# Altium PCB SIRA.PcbDoc
Units mil, origin at the board's own origin, x right, y up, seen from the top; angles counter-clockwise.
Board outline 5655.03 x 5610.03 mil, 2 copper layers (Top Layer, Bottom Layer); 41 components, 97 nets, 206 pads, 0 vias.
Unrouted connection lines stored in the file: 12.
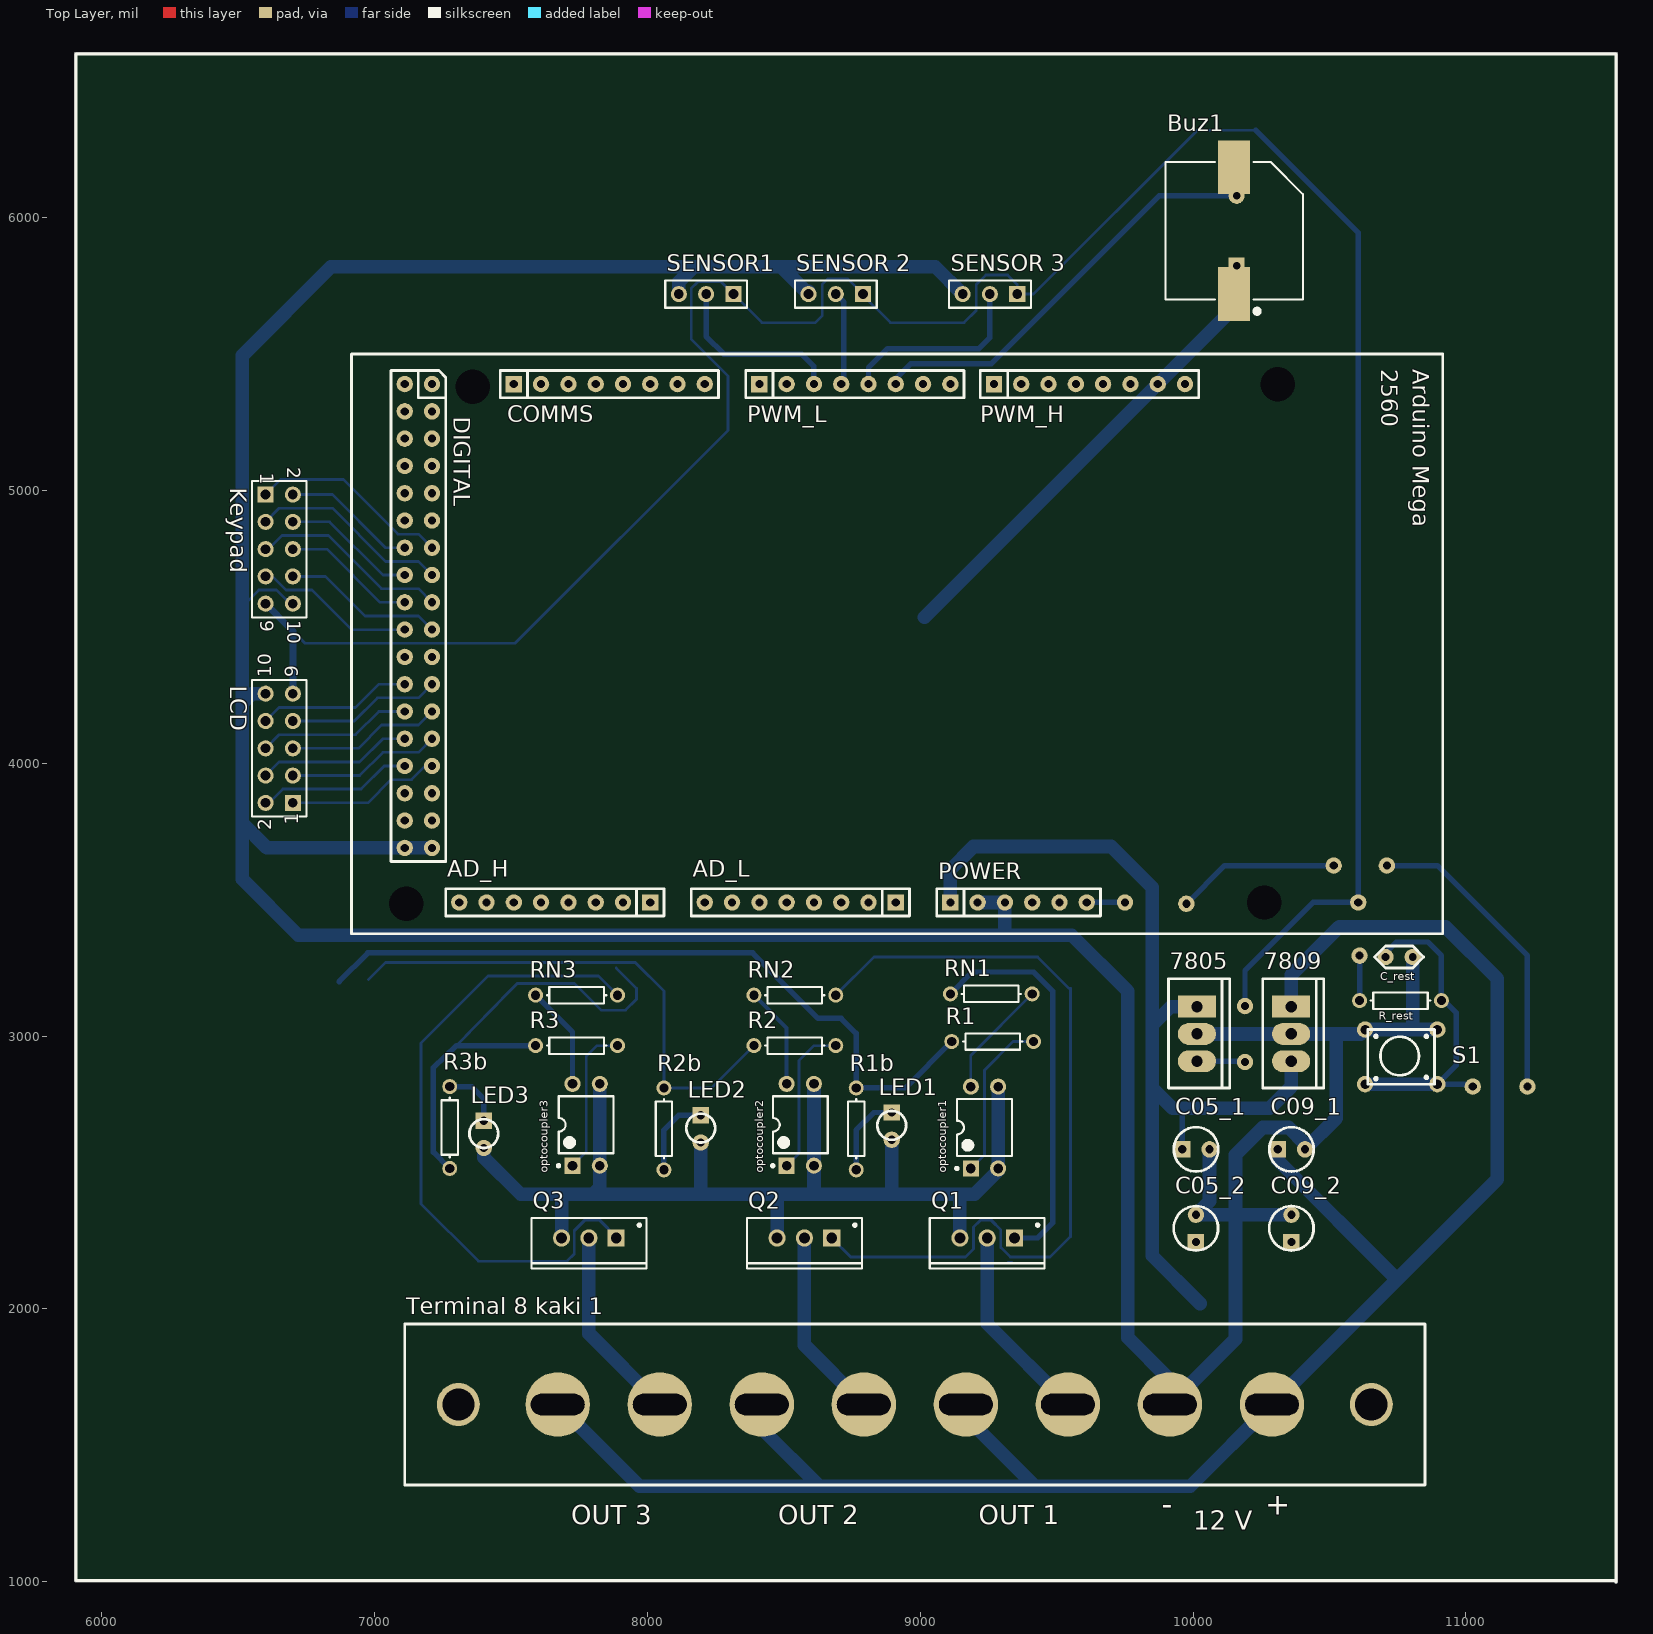
[diagram p0: Top Layer view]
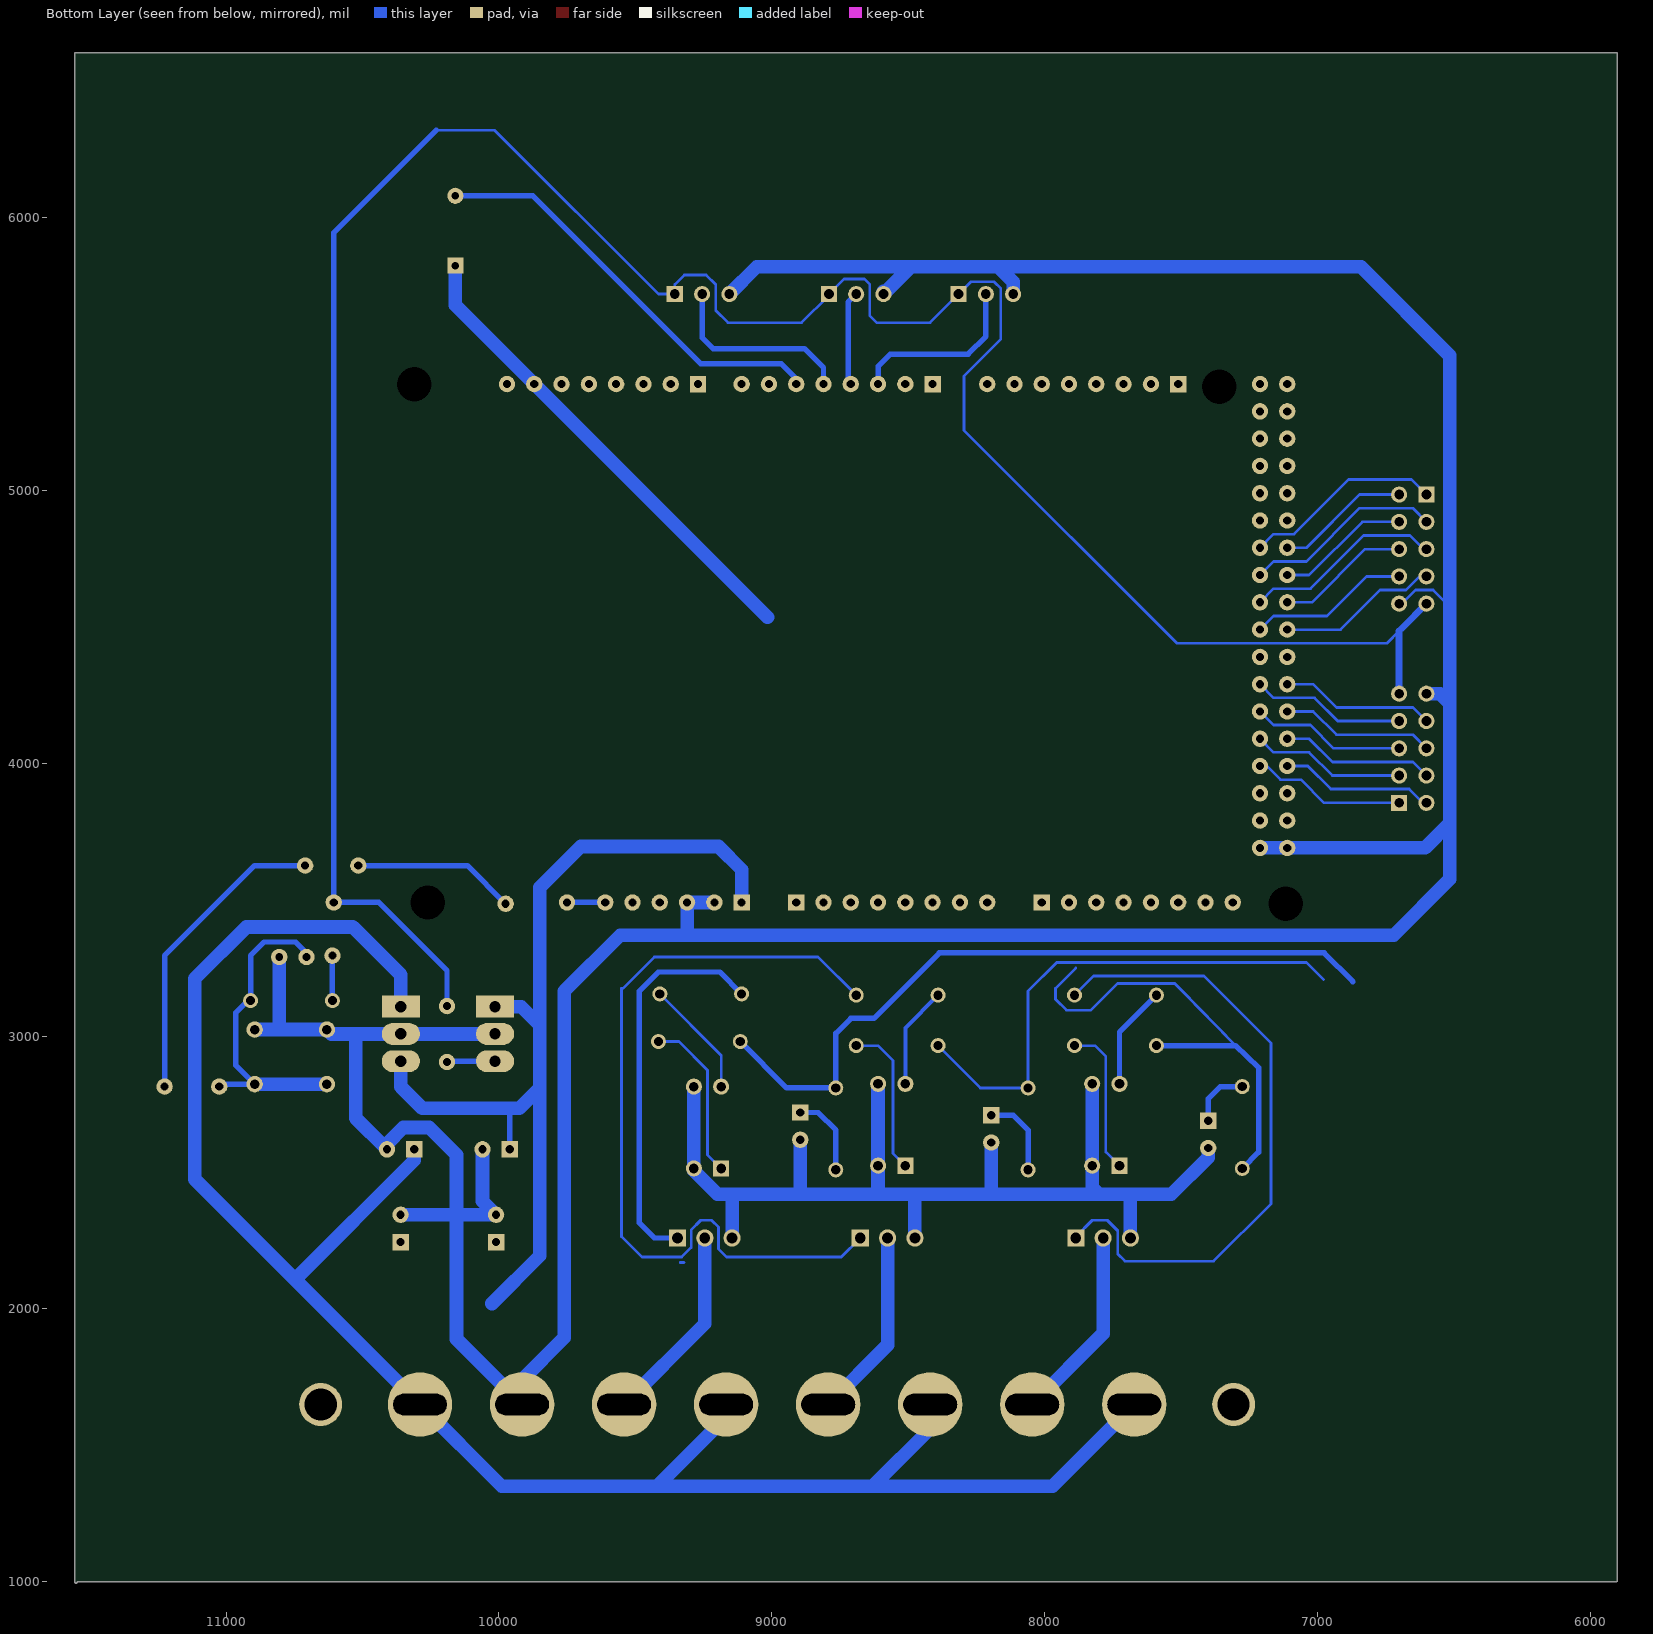
[diagram p1: Bottom Layer view, seen from below]

## Layer stack, top to bottom
Top Solder: solder mask 0.4, Solder Resist, Dk 3.5
Top Layer: signal copper 1.4
Dielectric 1: dielectric 12.6, FR-4, Dk 4.8
Bottom Layer: signal copper 1.4
Bottom Solder: solder mask 0.4, Solder Resist, Dk 3.5

## Board outline
5899.98,1005 ccw(c5905,1005) 5905,999.99 11544.99,999.99 ccw(c11550,1000) 11555.01,1000 11555.01,6600 ccw(c11550,6600) 11550,6605.02 5905,6605.02 ccw(c5905,6600) 5899.98,6600

## Design rules (kind name [scope] priority, off if disabled: settings)
Clearance [All] p1: gap=10
PolygonConnect [All] p1: connectstyle=Relief reliefconductorwidth=10 reliefentries=4 polygonreliefangle="90 Angle" airgapwidth=10
RoomDefinition SIRA [InComponentClass('SIRA')] p1: confinementstyle=ConfineIn formatcopy=TRUE lockcomponents=FALSE outline 5905,1000 11555,1000 11555,6600 5905,6600
RoutingVias [All] p1: holewidth=28 width=50 viastyle="Through Hole" minholewidth=28 minwidth=50 maxholewidth=28 maxwidth=50
SolderMaskExpansion [All] p1: expansion=4
Width [All] p1: maxlimit=50 minlimit=10 preferedwidth=15
30 further rules are at their usual default settings.

## Components (designator, comment, footprint, x,y, rotation, side; value= is the part's Value field where it differs from the comment)
7805 "78XX/79XX" "78XX/79XX diri" 10310,3410 r0 top
7809 "78XX/79XX" "78XX/79XX diri" 10655,3410 r0 top
AD_H "AD_H" "Header 8x1 8.5mm" 8010,3490 r180 top
AD_L "AD_L" "Header 8x1 8.5mm" 8910,3490 r180 top
Buz1 "Buzzer" ABSM-1574 10150,5720 r90 top
C05_1 "cap 1uF/50V" "cap 1uF/50V" 9660,2585 r0 top
C05_2 "cap 1uF/50V" "cap 1uF/50V" 10010,1945 r90 top
C09_1 "cap 1uF/50V" "cap 1uF/50V" 10010,2585 r0 top
C09_2 "cap 1uF/50V" "cap 1uF/50V" 10360,1945 r90 top
C_rest "cap 22/33uF" "cap 22/33uF" 11105,3290 r180 top
COMMS "Communication" "Header 8x1 8.5mm" 7510,5390 r0 top
DIGITAL "IO_36" "HEADER 36X 8MM" 7210,5390 r270 top
Keypad "Header 5X2" HDR2X5 6600,4985 r270 top
LCD "Header 5X2" HDR2X5 6700,3855 r90 top
LED1 "LED kecil" "LED kecil" 8995,2620 r270 top
LED2 "LED kecil" "LED kecil" 8295,2610 r270 top
LED3 "LED kecil" "LED kecil" 7500,2590 r270 top
optocoupler1 "Optoisolator1" DIP-4 9235,2665 r90 top
optocoupler2 "Optoisolator1" DIP-4 8560,2675 r90 top
optocoupler3 "Optoisolator1" DIP-4 7775,2675 r90 top
POWER "POWER" "Header 6x1 8.5mm" 9110,3490 r0 top
PWM_H "PWM_H" "Header 8x1 8.5mm" 9270,5390 r0 top
PWM_L "PWM_L" "Header 8x1 8.5mm" 8410,5390 r0 top
Q1 "IRF540N" TO-220AB 9245,2260 r180 top
Q2 "IRF540N" TO-220AB 8575,2260 r180 top
Q3 "IRF540N" TO-220AB 7785,2260 r180 top
R1 "Res1" AXIAL-0.3 9265,2980 r0 top
R1b "Res1" AXIAL-0.3 8765,2660 r90 top
R2 "Res1" AXIAL-0.3 8540,2965 r0 top
R2b "Res1" AXIAL-0.3 8060,2660 r90 top
R3 "Res1" AXIAL-0.3 7740,2965 r0 top
R3b "Res1" AXIAL-0.3 7275,2665 r270 top
R_rest "Comment" AXIAL-0.3 10760,3130 r0 top
RN1 "Res1" AXIAL-0.3 9260,3155 r180 top
RN2 "Res1" AXIAL-0.3 8540,3150 r0 top
RN3 "Res1" AXIAL-0.3 7740,3150 r0 top
S1 "pushbutton" pushbutton 11195,2925 r0 top
SENSOR1 "Header 3" HDR1X3 8315,5720 r180 top
"SENSOR 2" "Header 3" HDR1X3 8790,5720 r180 top
"SENSOR 3" "Header 3" HDR1X3 9355,5720 r180 top
"Terminal 8 kaki 1" "Terminal Blok 8 Kaki Besar" "TERMINAL 8 KAKI" 10850,1945 r180 top

## Footprints (in the part's own frame and the unit in brackets; to place one, negate y for a bottom-side part, rotate by r counter-clockwise, add the part's x,y. Pads: shape width x height; smd on the part's side, far side on the other; paste and mask are expansions set on the pad)
"78XX/79XX diri" [mil]
  rect 140x80 hole 42: 1(-296,-302)
  oval 140x80 hole 42: 2(-296,-402) 3(-296,-502)
  silkscreen extent -400,-600 -176,-200
ABSM-1574 [mm] "Magnetic Transducer Buzzer"
  rect 5x3 smd: 1(0,0) 2(11.8,0)
  rect 1.5x1.5 hole 0.7: 1A(2.65,-0.24)
  round 1.5 hole 0.7: 2A(9.15,-0.24)
  silkscreen extent -1.83,-6.4 12.3,6.4
AXIAL-0.3 [mm] "Axial Device, Thru-Hole; 2 Leads; 0.3 in Pin Spacing"
  round 1.4 hole 0.85: 1(-3.81,0) 2(3.81,0)
  silkscreen extent -2.77,-0.76 2.77,0.76
"cap 1uF/50V" [mil]
  rect 60x60 hole 30: 1(300,0)
  round 60 hole 30: 2(400,0)
  silkscreen extent 269,-81 432,81
"cap 22/33uF" [mil]
  round 60 hole 28: 1(300,0) 2(400,0)
  silkscreen extent 260,-40 440,40
DIP-4 [mm] "DIP; 4 Leads; Row Spacing 7.62 mm; Pitch 2.54 mm"
  rect 1.5x1.5 hole 0.9: 1(-3.81,1.27)
  round 1.5 hole 0.9: 2(-3.81,-1.27) 3(3.81,-1.27) 4(3.81,1.27)
  silkscreen extent -3.93,-2.55 2.65,2.69, body extent -3.15,-2.5 3.15,2.5, height 5.6
HDR1X3 [mm] "Connector; Header; 3 Position"
  rect 1.5x1.5 hole 0.9: 1(0,0)
  round 1.5 hole 0.9: 2(2.54,0) 3(5.08,0)
  silkscreen extent -1.27,-1.27 6.35,1.27
HDR2X5 [mm] "Connector; Header; 5x2 Position"
  rect 1.5x1.5 hole 0.9: 1(0,0)
  round 1.5 hole 0.9: 2(0,2.54) 3(2.54,0) 4(2.54,2.54) 5(5.08,0) 6(5.08,2.54) 7(7.62,0) 8(7.62,2.54) 9(10.16,0) 10(10.16,2.54)
  silkscreen extent -1.27,-1.27 11.43,3.81
"Header 6x1 8.5mm" [mil] "Stackable 6 pin header"
  rect 60x60 hole 30: 1(0,0)
  round 60 hole 30: 2(100,0) 3(200,0) 4(300,0) 5(400,0) 6(500,0)
  silkscreen extent -50,-50 550,50, body extent -50,-50 550,50, height 335
"Header 8x1 8.5mm" [mil] "Stackable 8 pin header"
  rect 60x60 hole 30: 1(0,0)
  round 60 hole 30: 2(100,0) 3(200,0) 4(300,0) 5(400,0) 6(500,0) 7(600,0) 8(700,0)
  silkscreen extent -50,-50 750,50, body extent -50,-50 750,50, height 335
"HEADER 36X 8MM" [mil] "Stackable 10 pin header"
  round 60 hole 30: 1(0,0) 2(0,-100) 3(100,0) 4(100,-100) 5(200,0) 6(200,-100) 7(300,0) 8(300,-100) 9(400,0) 10(400,-100) 11(500,0) 12(500,-100) 13(600,0) 14(600,-100) 15(700,0) 16(700,-100) 17(800,0) 18(800,-100) 19(900,-100) 20(900,0) 21(1000,0) 22(1000,-100) 23(1100,0) 24(1100,-100) 25(1200,0) 26(1200,-100) 27(1300,0) 28(1300,-100) 29(1400,0) 30(1400,-100) 31(1500,0) 32(1500,-100) 33(1600,0) 34(1600,-100) 35(1700,0) 36(1700,-100)
  silkscreen extent -50,-150 1750,50, body extent -50,-150 1750,50, height 335
"LED kecil" [mil]
  rect 60x60 hole 30: 1(-100,-100)
  round 60 hole 30: 2(0,-100)
  silkscreen extent -106,-153 0,-47
pushbutton [mil]
  round 60 hole 35: 1(-565,-101) 1(-300,-101) 2(-565,99) 2(-300,99)
  silkscreen extent -555,-101 -310,99
"TERMINAL 8 KAKI" [mm] "Terminal Blok Hitam 8 Kaki"
  round 6 hole 2 slot 5 at 0 deg: 1(14.25,7.5) 2(23.75,7.5) 3(33.25,7.5) 4(42.75,7.5) 5(52.25,7.5) 6(61.75,7.5) 7(71.25,7.5) 8(80.75,7.5)
  round 4 hole 3: " "(5,7.5) " "(90,7.5)
  silkscreen extent 0,0 95,15
TO-220AB [mm] "TO, Thru-Hole, Vertical, Heatsink Mounted; 3 In-Line Leads; Pitch 2.54 mm"
  rect 1.6x1.6 hole 1: 1(-2.54,0)
  round 1.6 hole 1: 2(0,0) 3(2.54,0)
  silkscreen extent -5.35,-1.85 5.35,2.85, body extent -5.4,-1.9 5.4,2.9, height 19.3

## Part data
7805 7809: library part 7805/7809/7812/7905/7909/7912
Buz1: "Magnetic Transducer Buzzer"
Keypad LCD: "Header, 5-Pin, Dual row"
optocoupler1 optocoupler2 optocoupler3: "4-Pin Phototransistor Optocoupler"
Q1 Q2 Q3: "HEXFET Power MOSFET"
R1 R1b R2 R2b R3 R3b RN1 RN2 RN3: "Resistor"
SENSOR1 "SENSOR 2" "SENSOR 3": "Header, 3-Pin"
"Terminal 8 kaki 1": library part "Terminal Block 8 kaki"

## Free pads (board coordinates)
  round 62.99 hole 125.98: 0(7115,3485) 0(7360,5380) 0(10260,3490) 0(10310,5390)
  round 60 hole 30: 2(10605,3490) 3(10610,3295) 4(10190,2905) 5(10190,3110) 6(9750,3490) 7(9975,3485) 8(11025,2815) 9(11225,2815) 10(10710,3625) 11(10515,3625)

## Nets (pads, with @x,y where several pads share a name; then routed paths per layer and width w, separated by ;. In a path a pad name is that pad's centre, name@x,y a point inside that pad or via, vN(x,y) a via of type N, cw(c..) or ccw(c..) an arc to the next point about the centre after c; other vN are vias at no path point)
3V3: POWER.5
5V: POWER.4
AD0: AD_L.1
AD1: AD_L.2
AD2: AD_L.3
AD3: AD_L.4
AD4: AD_L.5
AD5: AD_L.6
AD6: AD_L.7
AD7: AD_L.8
AD8: AD_H.1
AD9: AD_H.2
AD10: AD_H.3
AD11: AD_H.4
AD12: AD_H.5
AD13: AD_H.6
AD14: AD_H.7
AD15: AD_H.8
AREF: PWM_H.8
GND: 7805.2 7809.2 "SENSOR 2.3" "SENSOR 3.3" "Terminal 8 kaki 1.2" Buz1.1 Buz1.1A C05_1.2 C05_2.2 C09_1.2 C09_2.2 C_rest.1 DIGITAL.35 DIGITAL.36 Keypad.10 LCD.10 LED1.2 LED2.2 LED3.2 optocoupler1.2 optocoupler1.3 optocoupler2.2 optocoupler2.3 optocoupler3.2 optocoupler3.3 POWER.2 POWER.3 PWM_H.7 Q1.3 Q2.3 Q3.3 S1.2 SENSOR1.3 | length 20642.4
  Bottom Layer w10: 6515,4574.53 6575.47,4635 6639.64,4635 6689.64,4585 Keypad.10
  Bottom Layer w50: LCD.10 6550,4255 6515,4220 ; DIGITAL.35 DIGITAL.36 6605,3690 6515,3780 ; LED3.2 7400,2555 7535,2420 7695,2420 ; Q3.3 7685,2410 7695,2420 ; optocoupler3.3 optocoupler3.2 7825,2445 7800,2420 ; SENSOR1.3 8115,5765 8170,5820 ; 8195,2450 LED2.2 ; Q2.3 8475,2415 8470,2420 ; 8590,5730 8590,5720 8500,5810 8500,5820 ; optocoupler2.3 optocoupler2.2 8610,2430 8620,2420 ; LED1.2 8895,2434.28 8909.28,2420 ; 9015,4535 PWM_H.7 10159.45,5679.45 Buz1.1A ; Q1.3 9145,2415 9140,2420 ; 9155,5720 9055,5820 8500,5820 ; POWER.2 POWER.3 9310,3370 ; optocoupler1.3 optocoupler1.2 9285,2506.45 9198.55,2420 9140,2420 ; 7805.2 7809.2 10525,3008 ; C05_1.2 10060,2395 C05_2.2 10155,2345 ; C09_2.2 10155,2345 ; C_rest.1 10805,3039 10820,3024 ; S1.2@10895,3024 10820,3024 ; 6515,3780 6515,4220 ; 6515,3780 6515,3575 6720,3370 9015,3370 9310,3370 ; 6515,4220 6515,4574.53 6515,5495 6840,5820 8170,5820 ; 7695,2420 7800,2420 ; 7800,2420 8470,2420 ; 8170,5820 8500,5820 ; 8470,2420 8620,2420 ; 8620,2420 8909.28,2420 ; 8909.28,2420 9140,2420 ; 9310,3370 9555,3370 9760,3165 9760,1895 9914.96,1740.04 9914.96,1649.72 10155,1889.76 10155,2345 ; 10155,2345 10155,2565 10255,2665 10350,2665 10410,2605 C09_1.2 10525,2700 10525,3008 ; 10525,3008 10614,3008 10630,3024 10820,3024
GND2: 
IO22: DIGITAL.3
IO23: DIGITAL.4
IO24: DIGITAL.5
IO25: DIGITAL.6
IO26: DIGITAL.7
IO27: DIGITAL.8
IO28: DIGITAL.9
IO29: DIGITAL.10
IO30: DIGITAL.11
IO31: DIGITAL.12
IO32: DIGITAL.13 Keypad.1 | length 736.3
  Bottom Layer w10: Keypad.1 6655,5040 6885,5040 7085,4840 7160,4840 DIGITAL.13
IO33: DIGITAL.14 Keypad.2 | length 490.8
  Bottom Layer w10: Keypad.2 6845,4985 7040,4790 DIGITAL.14
IO34: DIGITAL.15 Keypad.3 | length 732.2
  Bottom Layer w10: Keypad.3 6650,4935 6845,4935 7040,4740 7160,4740 DIGITAL.15
IO35: DIGITAL.16 Keypad.4 | length 490.8
  Bottom Layer w10: Keypad.4 6835,4885 7030,4690 DIGITAL.16
IO36: DIGITAL.17 Keypad.5 | length 732.2
  Bottom Layer w10: Keypad.5 6610,4785 6660,4835 6830,4835 7025,4640 7160,4640 DIGITAL.17
IO37: DIGITAL.18 Keypad.6 | length 490.8
  Bottom Layer w10: Keypad.6 6825,4785 7020,4590 DIGITAL.18
IO38: DIGITAL.19 Keypad.7 | length 590.8
  Bottom Layer w10: Keypad.7 6625,4685 6675,4635 6770,4635 6915,4490 DIGITAL.19
IO39: DIGITAL.20 Keypad.8 | length 590.8
  Bottom Layer w10: Keypad.8 6820,4685 6965,4540 7160,4540 DIGITAL.20
IO40: DIGITAL.21
IO41: DIGITAL.22
IO42: DIGITAL.23 LCD.7 | length 565.9
  Bottom Layer w10: LCD.7 6925,4155 7010,4240 7160,4240 DIGITAL.23
IO43: DIGITAL.24 LCD.8 | length 565.9
  Bottom Layer w10: LCD.8 6649.53,4204.53 6929.53,4204.53 7015,4290 DIGITAL.24
IO44: DIGITAL.25 LCD.5 | length 565.9
  Bottom Layer w10: LCD.5 6940,4055 7025,4140 7160,4140 DIGITAL.25
IO45: DIGITAL.26 LCD.6 | length 565.9
  Bottom Layer w10: LCD.6 6650,4105 6930,4105 7015,4190 DIGITAL.26
IO46: DIGITAL.27 LCD.3 | length 565.9
  Bottom Layer w10: LCD.3 6945,3955 7030,4040 7160,4040 DIGITAL.27
IO47: DIGITAL.28 LCD.4 | length 565.9
  Bottom Layer w10: LCD.4 6649.53,4004.53 6944.53,4004.53 7030,4090 DIGITAL.28
IO48: DIGITAL.29 LCD.1 | length 565.9
  Bottom Layer w10: LCD.1 6975,3855 7060,3940 7135,3940 7185,3990 DIGITAL.29
IO49: DIGITAL.30 LCD.2 | length 565.9
  Bottom Layer w10: LCD.2 6612.66,3855 6663.13,3905.47 6950.47,3905.47 7035,3990 DIGITAL.30
IO50: DIGITAL.31
IO51: DIGITAL.32 R3.1 R3b.2 | length 1760.4
  Bottom Layer w10: 7300,2965 7500,3170 7522.56,3192.56 7732.44,3192.56 7830,3095 7920,3095 7960,3135 7960,3175 7885,3250
  Bottom Layer w20: R3b.2 7215,2575 7215,2885 7300,2965 R3.1
IO52: DIGITAL.33 R1.1 R1b.2 | length 2681.1
  Bottom Layer w20: 6870,3200 6975,3305 8385,3305 8625,3065 8710,3065 8765,3010 R1b.2 8945,2810 R1.1
IO53: DIGITAL.34 R2.1 R2b.2 | length 1901.1
  Bottom Layer w10: 6977.5,3207.5 7040,3270 7955,3270 8060,3165 R2b.2 8235,2810 R2.1
MISO: 
MOSI: 
NetLED1_1: LED1.1 R1b.1 | length 301.9
  Bottom Layer w20: R1b.1 8765,2655 8830,2720 LED1.1
NetLED2_1: LED2.1 R2b.1 | length 302.8
  Bottom Layer w20: R2b.1 8060,2655 8115,2710 LED2.1
NetLED3_1: LED3.1 R3b.1 | length 223.6
  Bottom Layer w20: R3b.1 7355,2815 7400,2770 LED3.1
Netoptocoupler1_1: optocoupler1.1 R1.2 | length 604.2
  Bottom Layer w10: optocoupler1.1 9235,2565 9235,2875 9340,2980 R1.2
Netoptocoupler2_1: optocoupler2.1 R2.2 | length 561.4
  Bottom Layer w10: optocoupler2.1 8555,2570 8555,2910 8610,2965 R2.2
Netoptocoupler3_1: optocoupler3.1 R3.2 | length 552.3
  Bottom Layer w10: optocoupler3.1 7775,2575 7775,2925 7815,2965 R3.2
NetQ1_1: Q1.1 RN1.2 | length 1449.9
  Bottom Layer w20: RN1.2 9190,3235 9415,3235 9485,3165 9485,2315 9430,2260 Q1.1
NetQ2_1: Q2.1 RN2.2 | length 3007.5
  Bottom Layer w10: Q2.1 8745,2190 9165,2190 9195,2220 9195,2300 9220,2325 9260,2325 9295,2290 9295,2225 9330,2190 9475,2190 9550,2265 9550,3175 9545,3175 9430,3290 8830,3290 RN2.2
NetQ3_1: Q3.1 RN3.2 | length 2384.2
  Bottom Layer w10: Q3.1 7885,2265 7825,2325 7770,2325 7731.5,2286.5 7731.5,2201.5 7705,2175 7380,2175 7170,2385 7170,2975 7415,3220 7820,3220 RN3.2
NMOS1: optocoupler1.4 RN1.1 | length 433.2
  Bottom Layer w10: optocoupler1.4 9185,2930 RN1.1
NMOS2: optocoupler2.4 RN2.1 | length 374.7
  Bottom Layer w15: RN2.1 8510,3030 optocoupler2.4
NMOS3: optocoupler3.4 RN3.1 | length 380.9
  Bottom Layer w20: RN3.1 7725,3015 optocoupler3.4
OUT1: "Terminal 8 kaki 1.3" Q1.2 | length 732.9
  Bottom Layer w50: Q1.2 9245,1945.67 9540.94,1649.72
OUT2: "Terminal 8 kaki 1.5" Q2.2 | length 700.5
  Bottom Layer w50: Q2.2 8575,1867.64 8792.91,1649.72
OUT3: "Terminal 8 kaki 1.7" Q3.2 | length 717.9
  Bottom Layer w50: Q3.2 7785,1909.61 8044.88,1649.72
PWM2: PWM_L.3 SENSOR1.2 | length 660.6
  Bottom Layer w20: SENSOR1.2 8215,5565 8280,5500 8565,5500 8610,5455 PWM_L.3
PWM3: "SENSOR 2.2" PWM_L.4 | length 346.6
  Bottom Layer w20: 8690,5720 8720,5690 8720,5400 PWM_L.4
PWM4: "SENSOR 3.2" PWM_L.5 | length 710.6
  Bottom Layer w20: PWM_L.5 8810,5450 8880,5520 9215,5520 9255,5560 9255,5720
PWM5: Buz1.2 Buz1.2A PWM_L.6 | length 1547.1
  Bottom Layer w20: PWM_L.6 8910,5410 8965,5465 9260,5465 9875.24,6080.24 Buz1.2A
PWM6: PWM_L.7
PWM7: PWM_L.8
PWM8: PWM_H.1
PWM9: PWM_H.2
PWM10: PWM_H.3
PWM11: PWM_H.4
PWM12: PWM_H.5
PWM13: PWM_H.6
RESET: C_rest.2 pad.6 pad.7 pad.8 pad.9 pad.10 pad.11 POWER.6 R_rest.2 S1.1 | length 3054.3
  Bottom Layer w20: POWER.6 pad.6 ; pad.7 10115,3625 pad.11 ; C_rest.2 10705,3305 10745,3345 10860,3345 10910,3295 R_rest.2 10920,3130 10965,3085 10965,2894 10895,2824 11016,2824 pad.8 ; pad.10 10895,3625 11225,3295 pad.9
  Bottom Layer w50: S1.1@10630,2824 S1.1@10895,2824
RX0: PWM_L.1
RX1: COMMS.3
RX2: COMMS.5
RX3: COMMS.7
SCK: 
SCL: COMMS.1
SDA: COMMS.2
TX0: PWM_L.2
TX1: COMMS.4
TX2: COMMS.6
TX3: COMMS.8
VBAT+: 7809.1 "Terminal 8 kaki 1.1" "Terminal 8 kaki 1.4" "Terminal 8 kaki 1.6" "Terminal 8 kaki 1.8" C09_1.1 | length 7242.3
  Bottom Layer w50: 7670.87,1649.72 7970.59,1350 8630,1350 ; 8418.9,1649.72 8418.9,1561.1 8630,1350 ; 9166.93,1649.72 9166.93,1603.07 9420,1350 ; C09_1.1 10310,2545 10747.13,2107.87 ; 7809.1 10359,3224 10535,3400 10925,3400 11115,3210 11115,2475.75 10747.13,2107.87 ; 8630,1350 9420,1350 ; 9420,1350 9989.25,1350 10288.98,1649.72 10747.13,2107.87
VCC: 7805.3 "SENSOR 2.1" "SENSOR 3.1" C05_2.1 Keypad.9 LCD.9 pad.2 pad.3 pad.4 pad.5 R_rest.1 SENSOR1.1 | length 9631.7
  Bottom Layer w10: 6690,4495 6700,4485 6745,4440 7515,4440 8295,5220 8295,5420 8160,5555 8160,5740 8185,5765 8270,5765 SENSOR1.1 8420,5615 8615,5615 8640,5640 8640,5755 8660,5775 8735,5775 8790,5720 8790,5715 8890,5615 9160,5615 9205,5660 9205,5755 9240,5790 9320,5790 9355,5755 9355,5720 9415,5720 10015,6320 10230,6320 ; pad.4@10187,2908 pad.4
  Bottom Layer w20: 7805.3 pad.4@10187,2908 ; pad.5 10190,3240 10440,3490 pad.2 10605,5945 10230,6320 ; R_rest.1 pad.3
  Bottom Layer w25: Keypad.9 6690,4495 ; LCD.9 6700,4485
VIN: 7805.1 7809.3 C05_1.1 C09_2.1 POWER.1 | length 3572.1
  Bottom Layer w20: C05_1.1 9960,2715 9980,2735
  Bottom Layer w50: POWER.1 9110,3610 9195,3695 9700,3695 9850,3545 9850,3040 ; 7805.1 9918,3108 9850,3040 ; 10025,2020 9850,2195 9850,2810 ; 7809.3 10359,2814 10280,2735 9980,2735 9925,2735 9850,2810 ; 9850,2810 9850,3040
pads on no net: "Terminal 8 kaki 1. " DIGITAL.1 DIGITAL.2
copper on no net: | length 13.3
  Bottom Layer w10: 9321.72,2170 9335,2170

## Silkscreen, mask and mechanical layers (free items; w line width, h text height)
Top Overlay:
  lines w10: 5905,1005 11545,1005 11550,1000 11550,6600 5905,6600 5905,1005 ; 6915,3375 6915,5500 10915,5500 10915,3375 6915,3375
  text "2560" at 10690,5445 h60 r270
  text "Arduino Mega" at 10805,5445 h60 r270
  text "-" at 9885,1245 h80
  text "+" at 10265,1245 h80
  text "OUT 3" at 7720,1210 h70
  text "OUT 2" at 8480,1210 h70
  text "OUT 1" at 9215,1210 h70
  text "12 V" at 10000,1190 h70
Mechanical 1:
  circle w5: c10310,5390 r62.99
  circle w5: c10260,3490 r62.99

## Text inside footprints (layer, text, board x,y; h text height)
Keypad: Top Overlay "2" at 6680,5085 h50 r270; Top Overlay "1" at 6580,5065 h50 r270; Top Overlay "9" at 6580,4525 h50 r270; Top Overlay "10" at 6680,4525 h50 r270
LCD: Top Overlay "2" at 6620,3755 h50 r90; Top Overlay "9" at 6720,4315 h50 r90; Top Overlay "10" at 6620,4315 h50 r90; Top Overlay "1" at 6720,3775 h50 r90